# EAGLE board  watchwinder mirror (EAGLE 8.2.2)
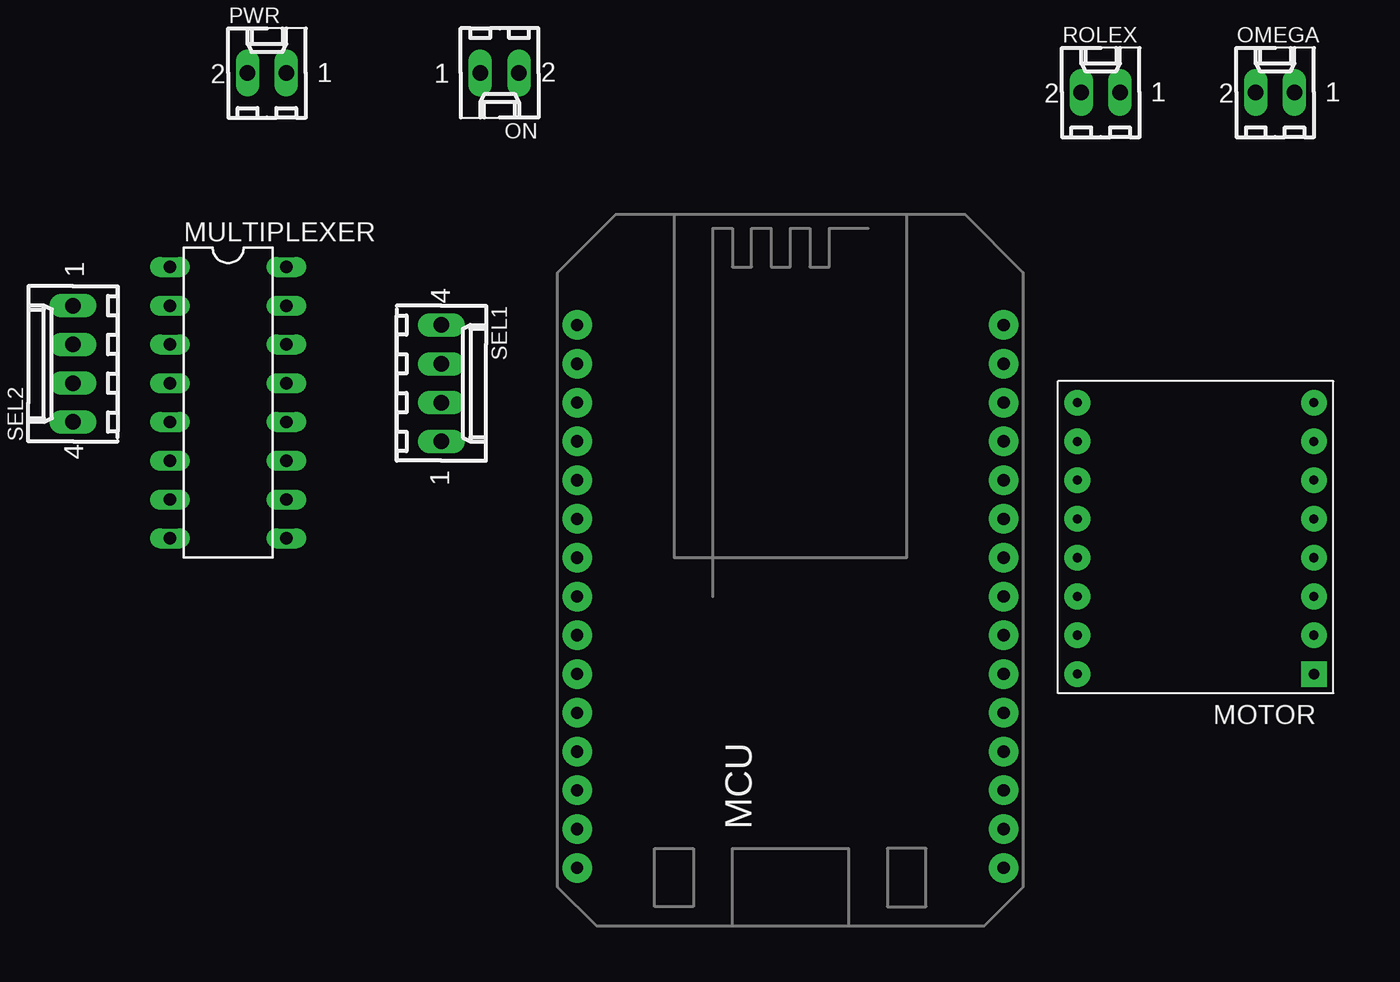
[diagram p0: board, top side]
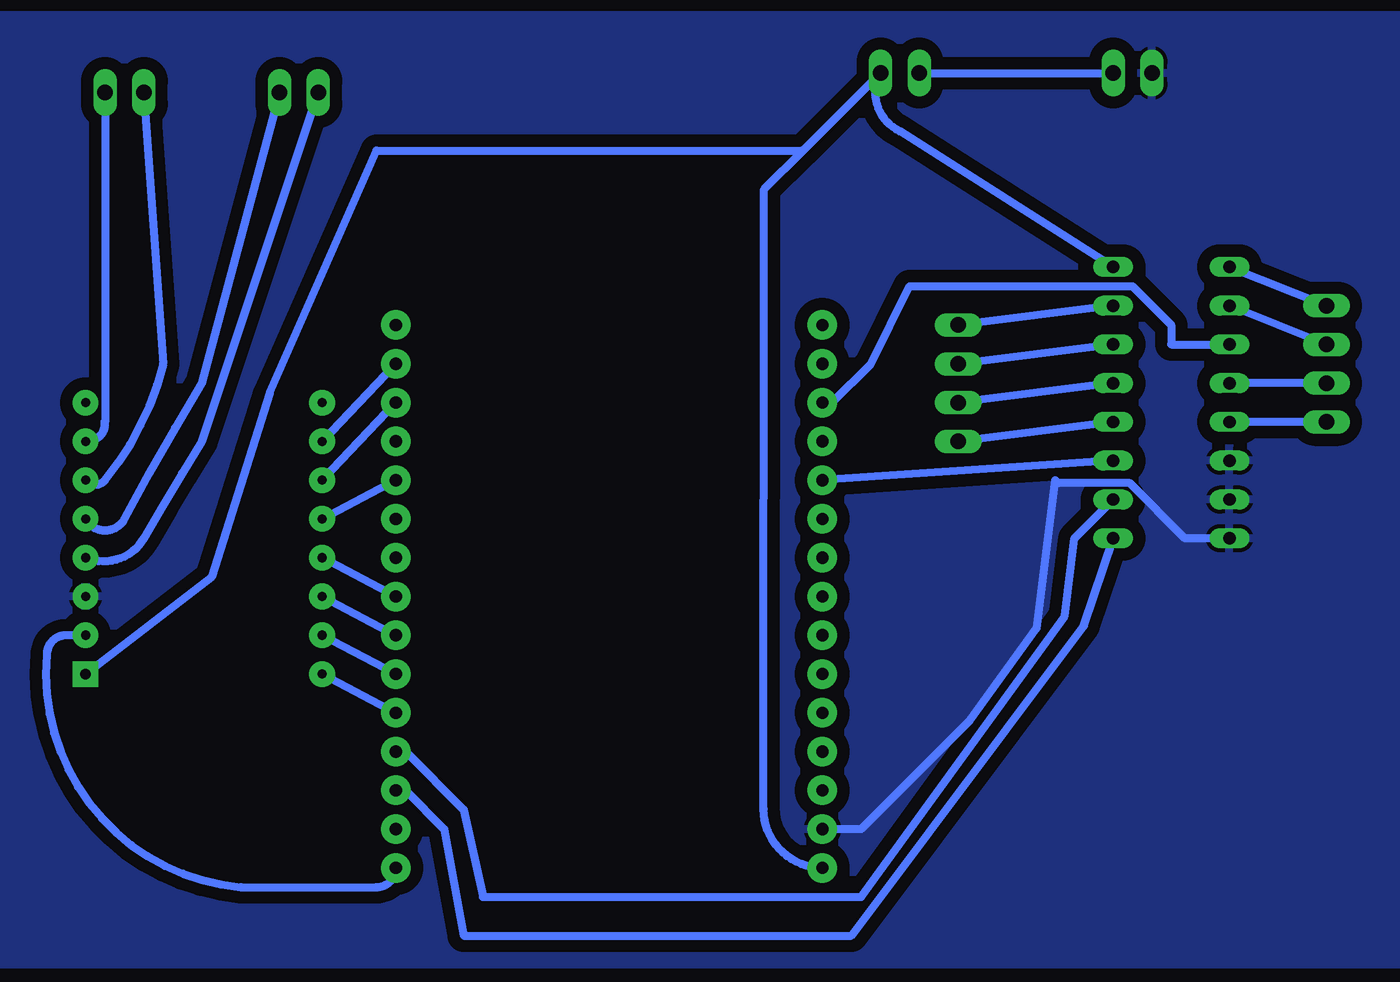
[diagram p1: board, bottom side, seen from below]

No outline drawn. Coordinates in mm, seen from the top.
Copper layers (1*16): Top 0.035mm / dielectric 1.5mm / Bottom 0.035mm
Design rules "default *": minimum track width 20mil, minimum drill 0.35mm, track to track 20mil, track to pad 6mil, pad to pad 6mil, via to via 20mil, smd to smd 6mil, copper to edge 40mil, drill to drill 6mil, minimum pad ring 10mil, minimum via ring 8mil, stop-mask expansion 4mil, vias tented up to drill 0mil, thermal gap 10mil
Net classes: 0 default: width 0.508 mm, clearance 0.127 mm

## Footprints (pad centres in the part's own frame; a part is rotated, then mirrored left to right if it is on the bottom)
ESP12_DEVKIT = drill 0.8 pad 1.93: 3V3@0 -13.97,-7.62; 3V3@1 13.97,5.08; 3V3@2 13.97,-17.78; 3V3@3 -13.97,-2.54; 5V -13.97,-17.78; A0 -13.97,17.78; D0 13.97,17.78; D1 13.97,15.24; D2 13.97,12.7; D3 13.97,10.16; D4 13.97,7.62; D5 13.97,0; D6 13.97,-2.54; D7 13.97,-5.08; D8 13.97,-7.62; EN -13.97,-10.16; GND@0 -13.97,-5.08; GND@1 -13.97,-15.24; GND@2 13.97,2.54; GND@3 13.97,-15.24; GND@4 -13.97,0; RST -13.97,-12.7; RSV@0 -13.97,15.24; RSV@1 -13.97,12.7; RSV@2 -13.97,10.16; RSV@3 -13.97,7.62; RSV@4 -13.97,5.08; RSV@5 -13.97,2.54; RX 13.97,-10.16; TX 13.97,-12.7
TB6612FNG = drill 0.6 pad 1.676: A1 -7.62,-1.27; A2 -7.62,-3.81; AIN1 7.874,1.27; AIN2 7.874,3.81; B1 -7.62,-8.89; B2 -7.62,-6.35; BIN1 7.874,-3.81; BIN2 7.874,-6.35; GND1 -7.62,1.27; GND2 -7.62,-11.43; GND3 7.874,-11.43; PWMA 7.874,6.35; PWMB 7.874,-8.89; STBY 7.874,-1.27; VCC -7.62,3.81 | drill 0.7 pad 1.676 square: VM -7.62,6.35
DIL16 = drill 0.813 long: 1 -8.89,-3.81; 2 -6.35,-3.81; 3 -3.81,-3.81; 4 -1.27,-3.81; 5 1.27,-3.81; 6 3.81,-3.81; 7 6.35,-3.81; 8 8.89,-3.81; 9 8.89,3.81; 10 6.35,3.81; 11 3.81,3.81; 12 1.27,3.81; 13 -1.27,3.81; 14 -3.81,3.81; 15 -6.35,3.81; 16 -8.89,3.81
6410-02 = drill 1.016 long: 1 1.27,0; 2 -1.27,0
6410-04 = drill 1.016 long: 1 3.81,0; 2 1.27,0; 3 -1.27,0; 4 -3.81,0

## Placement (x,y rotation side)
MCU  ESP12_DEVKIT  [ESP12_DEVKIT]  52.07,24.13 0 top
MOTOR  TB6612FNG  [TB6612FNG]  78.74,25.4 180 top
MULTIPLEXER  4051N  [DIL16]  15.24,36.83 270 top
OMEGA  22-27-2021-02  [6410-02]  83.82,57.15 0 top
ON  22-27-2021-02  [6410-02]  33.02,58.42 180 top
PWR  22-27-2021-02  [6410-02]  17.78,58.42 0 top
ROLEX  22-27-2021-02  [6410-02]  72.39,57.15 0 top
SEL1  22-27-2041-04  [6410-04]  29.21,38.1 270 top
SEL2  22-27-2041-04  [6410-04]  5.08,39.37 90 top

## Library data of the parts
MCU = ESP12_DEVKIT
MOTOR = TB6612FNG
MULTIPLEXER = 40xx
OMEGA ON PWR ROLEX SEL1 SEL2 = con-molex; OC_FARNELL: unknown; OC_NEWARK: unknown

## Nets
GND: MCU.GND@1 MOTOR.GND1 MULTIPLEXER.6 MULTIPLEXER.7 MULTIPLEXER.8 PWR.2
N$1: MCU.D1 MOTOR.PWMB
N$2: MCU.D2 MOTOR.BIN2
N$3: MCU.D4 MOTOR.BIN1
N$4: MCU.D5 MOTOR.STBY
N$5: MCU.D6 MOTOR.AIN1
N$6: MCU.D7 MOTOR.AIN2
N$7: MCU.D8 MOTOR.PWMA
N$8: MOTOR.A2 ROLEX.1
N$9: MOTOR.A1 ROLEX.2
N$10: MOTOR.B1 OMEGA.1
N$11: MOTOR.B2 OMEGA.2
N$12: MCU.3V3@2 MOTOR.VCC
N$13: ON.1 PWR.1
N$14: MCU.5V MOTOR.VM MULTIPLEXER.16 ON.2
N$16: MULTIPLEXER.12 SEL1.1
N$17: MULTIPLEXER.14 SEL1.3
N$18: MULTIPLEXER.15 SEL1.4
N$19: MULTIPLEXER.13 SEL1.2
N$20: MULTIPLEXER.1 SEL2.1
N$21: MULTIPLEXER.2 SEL2.2
N$22: MULTIPLEXER.4 SEL2.3
N$23: MULTIPLEXER.5 SEL2.4
N$24: MCU.RX MULTIPLEXER.10
N$25: MCU.RSV@3 MULTIPLEXER.11
N$26: MCU.TX MULTIPLEXER.9
N$27: MCU.RSV@1 MULTIPLEXER.3

## Tracks (layer width: path | path; a pad name or v marks a point on that pad's centre or on a via)
GND
  Bottom 0.508: 38.73,8.89 MCU.GND@1 35.56,8.89 28.44,16.01 24.07,22.04 22.86,31.75 22.66,31.55 17.95,31.55 14.34,27.94 MULTIPLEXER.8
  pour Bottom (isolate 0.813): 0,62.23 0,0 93.98,0 92.71,62.23
N$1
  Bottom 0.508: MOTOR.PWMB MCU.D1
N$2
  Bottom 0.508: MCU.D2 MOTOR.BIN2
N$3
  Bottom 0.508: MOTOR.BIN1 MCU.D4
N$4
  Bottom 0.508: MCU.D5 MOTOR.STBY
N$5
  Bottom 0.508: MOTOR.AIN1 MCU.D6
N$6
  Bottom 0.508: MCU.D7 MOTOR.AIN2
N$7
  Bottom 0.508: MOTOR.PWMA MCU.D8
N$8
  Bottom 0.508: ROLEX.1 78.74,38.1 arc-4 83.82,29.21 arc124 MOTOR.A2
N$9
  Bottom 0.508: ROLEX.2 78.74,34.29 arc-2 82.55,27.94 arc83 MOTOR.A1
N$10
  Bottom 0.508: OMEGA.1 85.07,35.67 85.12,35.57 arc103 MOTOR.B1
N$11
  Bottom 0.508: OMEGA.2 81.28,39.37 arc25 85.09,31.75 arc102 MOTOR.B2
N$12
  Bottom 0.508: MOTOR.VCC 87.63,21.59 arc-90 88.9,20.32 arc-90 76.2,5.08 67.31,5.08 arc-90 MCU.3V3@2
N$13
  Bottom 0.508: ON.1 PWR.1
N$14
  Bottom 0.508: MOTOR.VM 78.11,25.4 74.3,37.47 67.31,53.34 39.41,53.34 arc90 39.39,53.32 | MCU.5V arc90 41.95,10.2 41.91,50.8 39.39,53.32 | 39.39,53.32 ON.2 arc-93 33.02,54.61 MULTIPLEXER.16
N$16
  Bottom 0.508: MULTIPLEXER.12 SEL1.1
N$17
  Bottom 0.508: MULTIPLEXER.14 SEL1.3
N$18
  Bottom 0.508: MULTIPLEXER.15 SEL1.4
N$19
  Bottom 0.508: MULTIPLEXER.13 SEL1.2
N$20
  Bottom 0.508: SEL2.1 MULTIPLEXER.1
N$21
  Bottom 0.508: SEL2.2 MULTIPLEXER.2
N$22
  Bottom 0.508: SEL2.3 MULTIPLEXER.4
N$23
  Bottom 0.508: SEL2.4 MULTIPLEXER.5
N$24
  Bottom 0.508: MCU.RX 65.41,13.97 61.59,10.16 60.33,4.45 35.56,4.45 22.23,22.86 21.59,27.94 MULTIPLEXER.10
N$25
  Bottom 0.508: MULTIPLEXER.11 MCU.RSV@3
N$26
  Bottom 0.508: MCU.TX 65.41,11.43 62.87,8.89 61.59,1.91 36.2,1.91 20.95,22.23 MULTIPLEXER.9
N$27
  Bottom 0.508: MULTIPLEXER.3 15.24,40.64 15.24,41.91 17.78,44.45 32.38,44.45 34.92,39.37 37.47,36.83 MCU.RSV@1